# Altium PCB PCB1.PcbDoc
Units mm, origin at the board's own origin, x right, y up, seen from the top; angles counter-clockwise.
Board outline 100.08 x 35.94 mm, 2 copper layers (Top Layer, Bottom Layer); 25 components, 21 nets, 87 pads, 0 vias.
Unrouted connection lines stored in the file: 2.
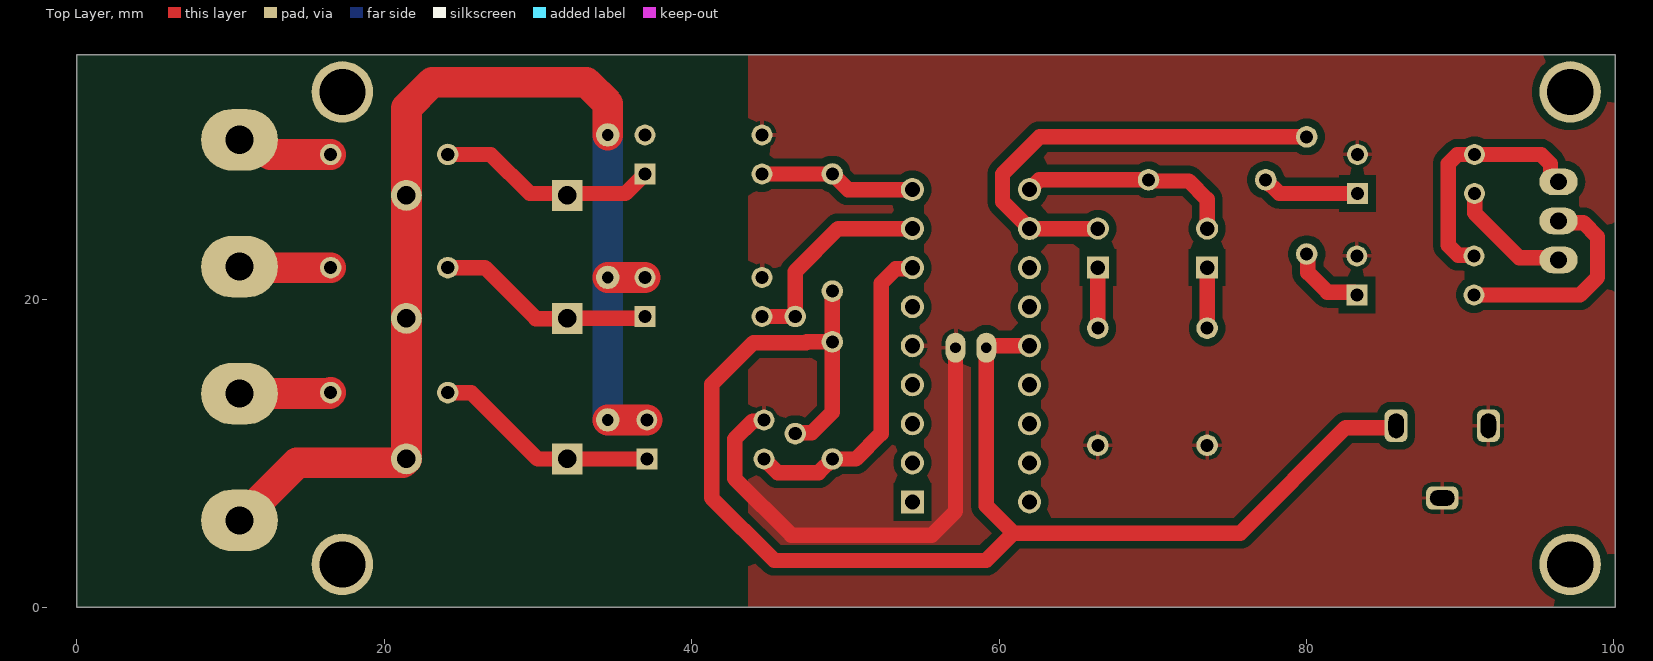
[diagram p0: Top Layer view]
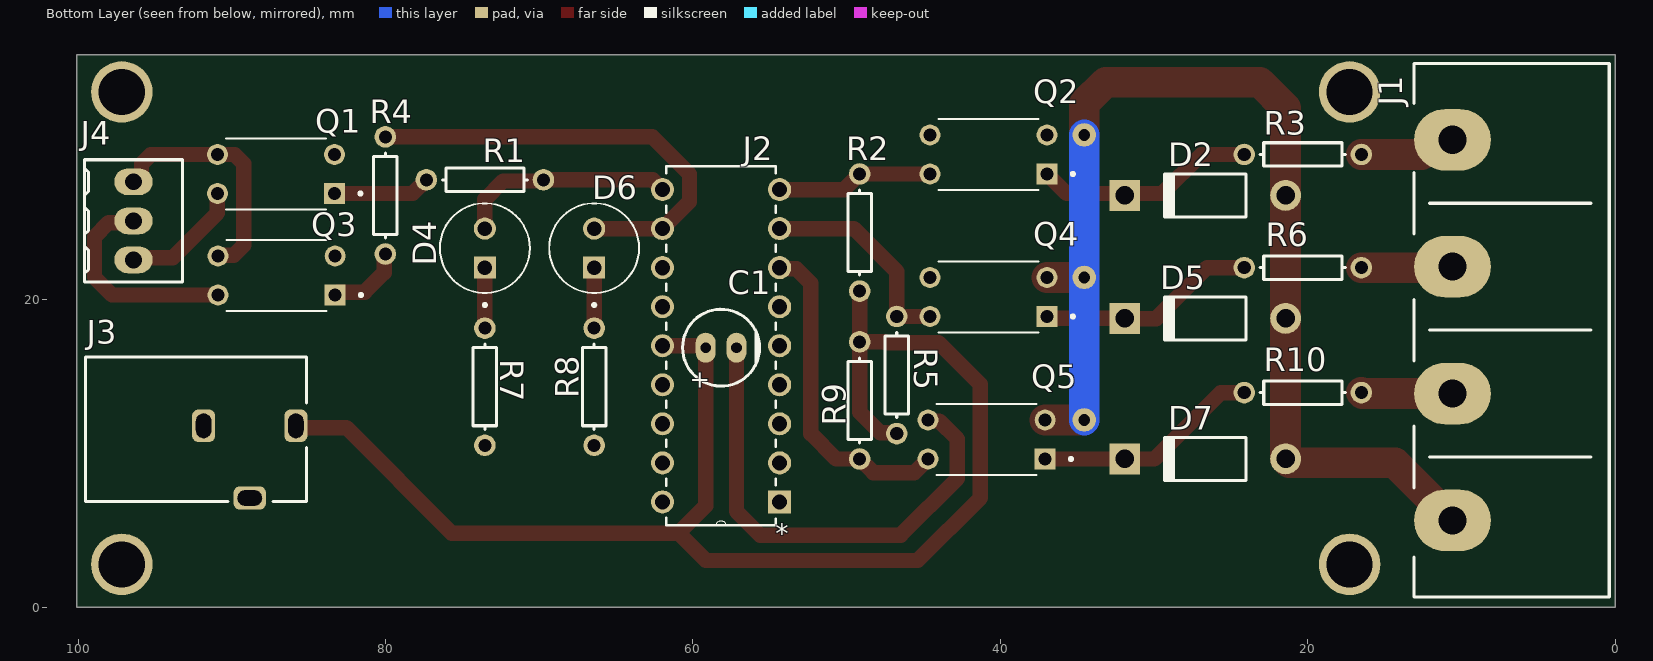
[diagram p1: Bottom Layer view, seen from below]

## Layer stack, top to bottom
Top Solder: solder mask 0.0102, Solder Resist, Dk 3.5
Top Layer: signal copper 0.0356
Dielectric 1: dielectric 0.32, FR-4, Dk 4.8
Bottom Layer: signal copper 0.0356
Bottom Solder: solder mask 0.0102, Solder Resist, Dk 3.5

## Board outline
0,0 100.076,0 100.076,35.941 0,35.941

## Design rules (kind name [scope] priority, off if disabled: settings)
Clearance [All] p1: gap=0.5 ignorepadtopadclearanceinfootprint=FALSE
PolygonConnect [All] p1: connectstyle=Relief reliefconductorwidth=0.254 reliefentries=4 polygonreliefangle="90 Angle" airgapwidth=0.254
RoutingLayers [All] p1: top layer_v5=TRUE bottom layer_v5=FALSE
RoutingVias [All] p1: holewidth=0.711 width=1.27 viastyle="Through Hole" minholewidth=0.711 minwidth=1.27 maxholewidth=0.711 maxwidth=1.27
SolderMaskExpansion [All] p1: expansion=0.102 istentingtop=FALSE
Width [All] p1: maxlimit=2 minlimit=0.5 preferedwidth=1
29 further rules are at their usual default settings.

## Components (designator, comment, footprint, x,y, rotation, side; value= is the part's Value field where it differs from the comment)
C1 "0.1µF" "CAP TH ALUM ELEC D5.00mm S2.00mm H12.00mm" 58.166,16.891 r0 bottom
D2 "Diode 1N4007" DO-41 26.67,26.797 r0 bottom
D4 "HLMP-4719-A00B2" LEDRD254W47D584H1078 73.533,23.368 r90 bottom
D5 "Diode 1N4007" DO-41 26.67,18.796 r0 bottom
D6 "HLMP-4719-A00B2" LEDRD254W47D584H1078 66.421,23.368 r90 bottom
D7 "Diode 1N4007" DO-41 26.67,9.652 r0 bottom
J1 "4DB-P108-04" "TE 4DB-P108-04" 6.731,18.034 r270 bottom
J2 "PIC16F628A-I/P" DIP254P762X533-18 61.976,27.178 r0 bottom
J3 "PJ-102AH" "CUI PJ-102AH" 92.329,11.811 r90 bottom
J4 "282834-3" "TE 282834-3" 96.393,25.146 r90 bottom
Q1 "TLP785" DIP762W50P254L460H425Q4 87.122,28.194 r0 bottom
Q2 "TLP785" DIP762W50P254L460H425Q4 40.767,29.464 r0 bottom
Q3 "TLP785" DIP762W50P254L460H425Q4 87.086,21.59 r0 bottom
Q4 "TLP785" DIP762W50P254L460H425Q4 40.767,20.193 r0 bottom
Q5 "TLP785" DIP762W50P254L460H425Q4 40.894,10.922 r0 bottom
R1 "Res1" AXIAL-0.3 73.533,27.813 r0 bottom value=330
R2 "Res1" AXIAL-0.3 49.149,24.384 r270 bottom value=1K
R3 "Res1" AXIAL-0.3 20.32,29.464 r0 bottom value=330K
R4 "Res1" AXIAL-0.3 80.01,26.797 r270 bottom value=330
R5 "Res1" AXIAL-0.3 46.736,15.113 r270 bottom value=1K
R6 "Res1" AXIAL-0.3 20.32,22.098 r0 bottom value=330K
R7 "Res1" AXIAL-0.3 73.533,14.351 r90 bottom value=470
R8 "Res1" AXIAL-0.3 66.421,14.351 r90 bottom value=470
R9 "Res1" AXIAL-0.3 49.149,13.462 r90 bottom value=1K
R10 "Res1" AXIAL-0.3 20.32,13.97 r0 bottom value=330K

## Footprints (in the part's own frame and the unit in brackets; to place one, negate y for a bottom-side part, rotate by r counter-clockwise, add the part's x,y. Pads: shape width x height; smd on the part's side, far side on the other; paste and mask are expansions set on the pad)
AXIAL-0.3 [mm] "Axial Device, Thru-Hole; 2 Leads; 0.3 in Pin Spacing"
  round 1.4 hole 0.85: 1(-3.81,0) 2(3.81,0)
  silkscreen extent -2.77,-0.76 2.77,0.76
"CAP TH ALUM ELEC D5.00mm S2.00mm H12.00mm" [mm] "5mm Diameter 2mm Lead Spacing Aluminum Electrolytic Capacitors Radial, Can"
  oval 1.3x1.95 hole 0.7: 1(1,0) 2(-1,0)
  silkscreen extent -2.5,-2.5 2.5,2.5, body extent -2.51,-2.5 2.5,2.5, height 12
"CUI PJ-102AH" [mm] "DC Barrel Jack W/ Switch 2.0x5.5"
  rrect50% 2.1x1.5 hole 1 slot 1.6 at 0 deg: 1(0,-6.5) 2(0,-0.5)
  rrect50% 1.5x2.1 hole 1 slot 1.6 at 90 deg: 3(-4.7,-3.5)
  silkscreen extent -4.93,-7.2 4.48,7.2, body extent -4.92,-7.2 4.48,7.2, height 11
DIP254P762X533-18 [mil]
  rect 59x59 / inner round 59 / far side rect 59x59 hole 39: 1(-300,800)
  round 59 hole 39: 2(-300,700) 3(-300,600) 4(-300,500) 5(-300,400) 6(-300,300) 7(-300,200) 8(-300,100) 9(-300,0) 10(0,0) 11(0,100) 12(0,200) 13(0,300) 14(0,400) 15(0,500) 16(0,600) 17(0,700) 18(0,800)
  silkscreen extent -290,-60 -10,860, body extent -323,-63 23,863
DIP762W50P254L460H425Q4 [mm]
  rect 1.358x1.358 / inner round 1.358 / far side rect 1.358x1.358 hole 0.85 mask+0.102: 1(-3.81,1.27)
  round 1.358 hole 0.85 mask+0.102: 2(-3.81,-1.27) 3(3.81,-1.27) 4(3.81,1.27)
  silkscreen extent -5.59,-2.3 3.25,2.3, body extent -3.94,-2.3 3.94,2.3, height 4.6
DO-41 [mm] "Diode, Axial; Body 5.2 x 2.7 mm (LxDia. max), Lead Dia. 0.86 mm (max)"
  round 2 hole 1.2: 1(-5.23,0)
  rect 2x2 hole 1.2: 2(5.23,0)
  silkscreen extent -2.65,-1.4 2.75,1.4
LEDRD254W47D584H1078 [mm]
  rect 1.438x1.438 / inner round 1.438 / far side rect 1.438x1.438 hole 0.93: 1(-1.27,0)
  round 1.438 hole 0.93: 2(1.27,0)
  silkscreen extent -3.8,-2.92 2.92,2.92
"TE 4DB-P108-04" [mm] "Assembly, Dual Barrier 4DB P108"
  oval 4x5 hole 1.829: 1(-12.383,-3.85) 2(-4.128,-3.85) 3(4.127,-3.85) 4(12.383,-3.85)
  silkscreen extent -17.36,-6.35 17.36,6.35, body extent -17.34,-6.35 17.34,6.35, height 14.48
"TE 282834-3" [mm]
  oval 1.75x2.5 hole 1.1: 1(-2.54,0) 2(0,0) 3(2.54,0)
  silkscreen extent -3.97,-3.2 3.97,3.2, body extent -4.04,-3.25 4.04,3.25, height 10

## Part data
C1: library part UKL2A0R1KDD, "CAP ALUM 0.1UF 10% 100V RADIAL", Device Package="Radial, Can", Lifetime @ Temp.="2000 Hrs @ 85°C", manufacturer=Nichicon, Operating Temperature="-40°C ~ 85°C", Ripple Current @ High Frequency="4.2mA @ 10kHz", Ripple Current @ Low Frequency="2.1mA @ 120Hz", Supplier Part Number 1=493-16876-ND, Tolerance=±10%, Voltage - Rated=100V, Applications="General Purpose", Capacitance=0.1µF, componentlink1description=Datasheet, componentlink1url=http://nichicon-us.com/english/products/pdfs/e-ukl.pdf, componentlink2description="DigiKey Link", componentlink2url=http://digikey.com/product-detail/en/nichicon/UKL2A0R1KDD/493-16876-ND/2598554, Height - Seated (Max)="0.472\" (12.00mm)", lastupdated="9/4/2020 11:28:57 PM", Lead Spacing="0.079\" (2.00mm)", Lifecycle Status=Active, Minimum Order=1, Mounting Type="Through Hole", Package / Case="Radial, Can", packaging=Bulk, Part Number=UKL2A0R1KDD, Part Status=Active, partid=21583, Polarization=Polar, price=0.39, series=UKL, Size / Dimension="0.197\" Dia (5.00mm)", Supplier 1=DigiKey
D2 D5 D7: "1 Amp General Purpose Rectifier", Code_JEDEC=DO-204-AL, componentlink1description="Manufacturer Link", componentlink1url=http://www.fairchildsemi.com/, componentlink2description=Datasheet, componentlink2url=http://www.fairchildsemi.com/ds/1N%2F1N4001.pdf, DatasheetVersion=1998, LatestRevisionDate=17-Jul-2002, LatestRevisionNote="Re-released for DXP Platform.", PackageDescription="Diode, Axial; Body 5.2 x 2.7 mm (LxDia. max), Lead Dia. 0.86 mm (max)", PackageReference=DO-41, PackageVersion=Aug-1999, Published=8-Jun-2000, Publisher="Altium Limited"
D4 D6: "Yellow 5mm LED LOW CURRENT 2mA R/A T/L", Package=None, Check_prices=https://www.snapeda.com/parts/HLMP-4719-A00B2/Avago/view-part/?ref=eda, MF=Avago, MP=HLMP-4719-A00B2, SnapEDA_Link=https://www.snapeda.com/parts/HLMP-4719-A00B2/Avago/view-part/?ref=snap
J1: "CONN BARRIER STRIP 4CIRC 0.325\"", Color=Black, Current Rating (Amps)=20A, manufacturer="TE Connectivity AMP Connectors", Supplier Part Number 1=A98474-ND, Voltage Rating=150V, Barrier Type="2 Wall (Dual)", Bottom Termination="PC Pin", componentlink1description=Datasheet, componentlink1url=https://www.te.com/commerce/DocumentDelivery/DDEController?Action=srchrtrv&DocNm=2-1437667-4&DocType=Customer+Drawing&DocLang=English, componentlink2description="DigiKey Link", componentlink2url=http://digikey.com/product-detail/en/te-connectivity-amp-connectors/4DB-P108-04/A98474-ND/1277922, lastupdated="1/15/2020 4:13:12 AM", Lifecycle Status=Active, Minimum Order=1, Number of Circuits=4, Number of Rows=1, Number of Wire Entries=4, packaging=Bulk, Part Number=4DB-P108-04, Part Status=Active, Pitch="0.325\" (8.26mm)", price=2.22, series="4DB, Buchanan", Supplier 1=DigiKey, Terminal Block Type="Barrier Block", Top Termination="Screws with Captive Plate", Wire Gauge="12-22 AWG"
J2: "18-Pin 3.5 KB Flash 224 RAM 16 I/O, PIC 16F Series", Package="DIP-18 Microchip", Check_prices=https://www.snapeda.com/parts/PIC16F628A-I/P/Microchip/view-part/?ref=eda, MF=Microchip, MP=PIC16F628A-I/P, SnapEDA_Link=https://www.snapeda.com/parts/PIC16F628A-I/P/Microchip/view-part/?ref=snap
J3: "CONN PWR JACK 2X5.5MM SOLDER", Current Rating (Amps)=5A, manufacturer="CUI Devices", Material Flammability Rating="UL94 V-0", Supplier Part Number 1=CP-102AH-ND, Voltage - Rated=24VDC, Actual Diameter="0.079\" (2.00mm ID), 0.256\" (6.50mm OD)", componentlink1description=Datasheet, componentlink1url=https://www.cuidevices.com/product/resource/digikeypdf/pj-102ah.pdf, componentlink2description="DigiKey Link", componentlink2url=//digikey.com/product-detail/en/cui-devices/PJ-102AH/CP-102AH-ND/408448, Connector Type=Jack, Gender=Male, Industry Recognized Mating Diameter="2.00mm ID (0.079\"), 5.50mm OD (0.217\")", Internal Switch(s)="Single Switch, Normally Closed", lastupdated="12/16/2019 7:01:27 PM", Lifecycle Status=0, Mating Length/Depth="0.354\" (9.00mm)", Minimum Order=1, Mounting Type="Through Hole, Right Angle", Number of Positions/Contacts="2 Conductors, 3 Contacts", packaging=Tray, Part Number=PJ-102AH, Part Status=Active, price=0.76, series=-, Shielding=Unshielded, Supplier 1=DigiKey, Termination=Solder
J4: "TERM BLK 3P SIDE ENT 2.54MM PCB", Color=Green, Current=10A, manufacturer="TE Connectivity AMP Connectors", Supplier Part Number 1=A98334-ND, Voltage=150V, componentlink1description=Datasheet, componentlink1url=https://www.te.com/commerce/DocumentDelivery/DDEController?Action=srchrtrv&DocNm=282834&DocType=Customer+Drawing&DocLang=English, componentlink2description="DigiKey Link", componentlink2url=http://digikey.com/product-detail/en/te-connectivity-amp-connectors/282834-3/A98334-ND/1153264, lastupdated="1/15/2020 4:15:50 AM", Lifecycle Status=Active, Mating Orientation="Horizontal with Board", Minimum Order=1, Mounting Type="Through Hole", Number of Levels=1, packaging=Bulk, Part Number=282834-3, Part Status=Active, Pitch="0.100\" (2.54mm)", Positions Per Level=3, price=2.01, series=Buchanan, Supplier 1=DigiKey, Wire Gauge="16-30 AWG", Wire Termination="Screw - Rising Cage Clamp"
Q1 Q2 Q3 Q4 Q5: "Optoisolator Transistor Output 5000Vrms 1 Channel 4-DIP", Package="SMD-4 Toshiba", Check_prices=https://www.snapeda.com/parts/TLP785/Toshiba/view-part/?ref=eda, MF=Toshiba, MP=TLP785, SnapEDA_Link=https://www.snapeda.com/parts/TLP785/Toshiba/view-part/?ref=snap
R1 R2 R3 R4 R5 R6 R7 R8 R9 R10: "Resistor", LatestRevisionDate=17-Jul-2002, LatestRevisionNote="Re-released for DXP Platform.", PackageDescription="Axial Device, Thru-Hole; 2 Leads; 0.3 in Pin Spacing", PackageReference=AXIAL-0.3, Published=8-Jun-2000, Publisher="Altium Limited"

## Free pads (board coordinates)
  round 4 hole 3: 1(17.272,2.794) 1(17.272,33.528) 1(97.155,2.794) 1(97.155,33.528)
  round 1.524 hole 0.762: 2(34.544,30.734) 4(34.544,21.463) 6(34.544,12.192)

## Nets (pads, with @x,y where several pads share a name; then routed paths per layer and width w, separated by ;. In a path a pad name is that pad's centre, name@x,y a point inside that pad or via, vN(x,y) a via of type N, cw(c..) or ccw(c..) an arc to the next point about the centre after c; other vN are vias at no path point)
+5: C1.1 J2.14 J3.1 R2.2 R5.2 R9.2 | length 92.4
  Top Layer w1: R5.2 46.784,11.351 47.8,11.351 49.149,12.7 R9.2 ; R2.2 R9.2 ; J2.14 59.293,17.018 C1.1 59.166,6.595 60.935,4.826 ; J3.1@85.579,11.684 82.55,11.684 75.692,4.826 60.935,4.826 ; R9.2 47.489,17.272 47.44,17.223 44.02,17.223 41.299,14.502 41.299,7.126 45.377,3.048 59.157,3.048 60.935,4.826
GND: C1.2 J2.5 J3.2 J3.3 Q1.2 Q2.3 Q3.2 Q4.3 Q5.3 R7.1 R8.1 | length 32.2
  Top Layer w1: Q5.3 44.636,12.124 43.971,12.124 42.799,10.951 42.799,8.382 46.482,4.699 55.626,4.699 57.166,6.239 C1.2
IN1: J2.9 Q2.4 R2.1 | length 10.2
  Top Layer w1: Q2.4 R2.1 50.165,27.178 J2.9
IN2: J2.8 Q4.4 R5.1 | length 13.9
  Top Layer w1: Q4.4 R5.1 46.736,21.844 49.53,24.638 J2.8
IN3: J2.7 Q5.4 R9.1 | length 21.3
  Top Layer w1: Q5.4 45.593,8.763 48.26,8.763 R9.1 50.673,9.652 52.324,11.303 52.324,21.082 53.258,22.016 54.274,22.016 J2.7
IsCorrect: J4.1 Q1.4 | length 8
  Top Layer w1: Q1.4 90.932,25.654 93.836,22.75 96.249,22.75 J4.1
IsFalse: J4.2 Q3.4 | length 14.1
  Top Layer w1: Q3.4 97.79,20.32 98.933,21.463 98.933,24.105 98.009,25.028 96.511,25.028 J4.2
NetD2_2: D2.2 Q2.1 R3.2 | length 14.6
  Top Layer w1: R3.2@23.945,29.464 26.924,29.464 29.464,26.924 35.687,26.924 Q2.1
NetD4_1: D4.1 R7.2 | length 3.9
  Top Layer w1: R7.2 D4.1
NetD5_2: D5.2 Q4.1 R6.2 | length 14.4
  Top Layer w1: R6.2@23.945,22.098 26.543,22.098 29.859,18.782 D5.2@32.281,18.782 ; D5.2@32.281,18.796 36.83,18.796 Q4.1
NetD6_1: D6.1 R8.2 | length 3.9
  Top Layer w1: R8.2 D6.1
NetD7_2: D7.2 Q5.1 R10.2 | length 15
  Top Layer w1: R10.2@23.945,13.97 25.654,13.97 29.972,9.652 D7.2 ; D7.2@31.877,9.652 34.567,9.652 Q5.1
NetQ1_1: Q1.1 R1.2 | length 6.3
  Top Layer w1: R1.2 78.232,26.924 Q1.1
NetQ3_1: Q3.1 R4.2 | length 5
  Top Layer w1: R4.2 80.087,22.91 80.087,21.767 81.355,20.499 83.097,20.499 Q3.1
NEUTRAL: D2.1 D5.1 D7.1 J1.4 pad.2 pad.4 pad.6 Q2.2 Q4.2 Q5.2 | length 75.3
  Top Layer w2: J1.4 14.327,9.398 21.186,9.398 D7.1 D5.1 21.44,32.489 23.114,34.163 33.147,34.163 34.544,32.766 pad.2 ; pad.6 Q5.2 ; pad.4 Q4.2
  Bottom Layer w2: pad.6 pad.4 pad.2
OUT1: D4.2 J2.10 R1.1 | length 14.3
  Top Layer w1: J2.10 62.611,27.813 R1.1 69.8,27.736 72.34,27.736 73.533,26.543 D4.2
OUT2: D6.2 J2.11 R4.1 | length 29.5
  Top Layer w1: D6.2 J2.11 60.223,26.391 60.223,28.194 62.636,30.607 R4.1
OUT_GND: J4.3 Q1.3 Q3.3 | length 15.9
  Top Layer w1: Q3.3 90.845,22.911 89.865,22.911 89.23,23.546 89.23,28.878 89.816,29.464 Q1.3 95.266,29.464 95.874,28.855 95.874,28.032 96.221,27.686 J4.3
PHASE1: J1.1 R3.1 | length 6.3
  Top Layer w2: J1.1 11.622,30.416 12.575,29.464 R3.1
PHASE2: J1.2 R6.1 | length 6
  Top Layer w2: J1.2 10.644,22.098 R6.1
PHASE3: J1.3 R10.1 | length 6
  Top Layer w2: J1.3 16.447,13.906 R10.1
pads on no net: J2.1 J2.2 J2.3 J2.4 J2.6 J2.12 J2.13 J2.15 J2.16 J2.17 J2.18

## Polygon pours and split planes (outlines as drawn)
GND on Top Layer "GND_L01_P000" (solid, remove dead copper, pour order 0): 43.688,35.941 43.688,0 100.076,0 100.076,35.941

## Text inside footprints (layer, text, board x,y; h text height)
C1: Bottom Overlay "+" at 58.866,15.641 h2 r180
J2: Bottom Overlay "*" at 53.772,5.994 h1.27 r180; Mechanical 13 "*" at 53.772,5.994 h1.27 r180